# EAGLE board PCB_v20 (EAGLE 9.7.0)
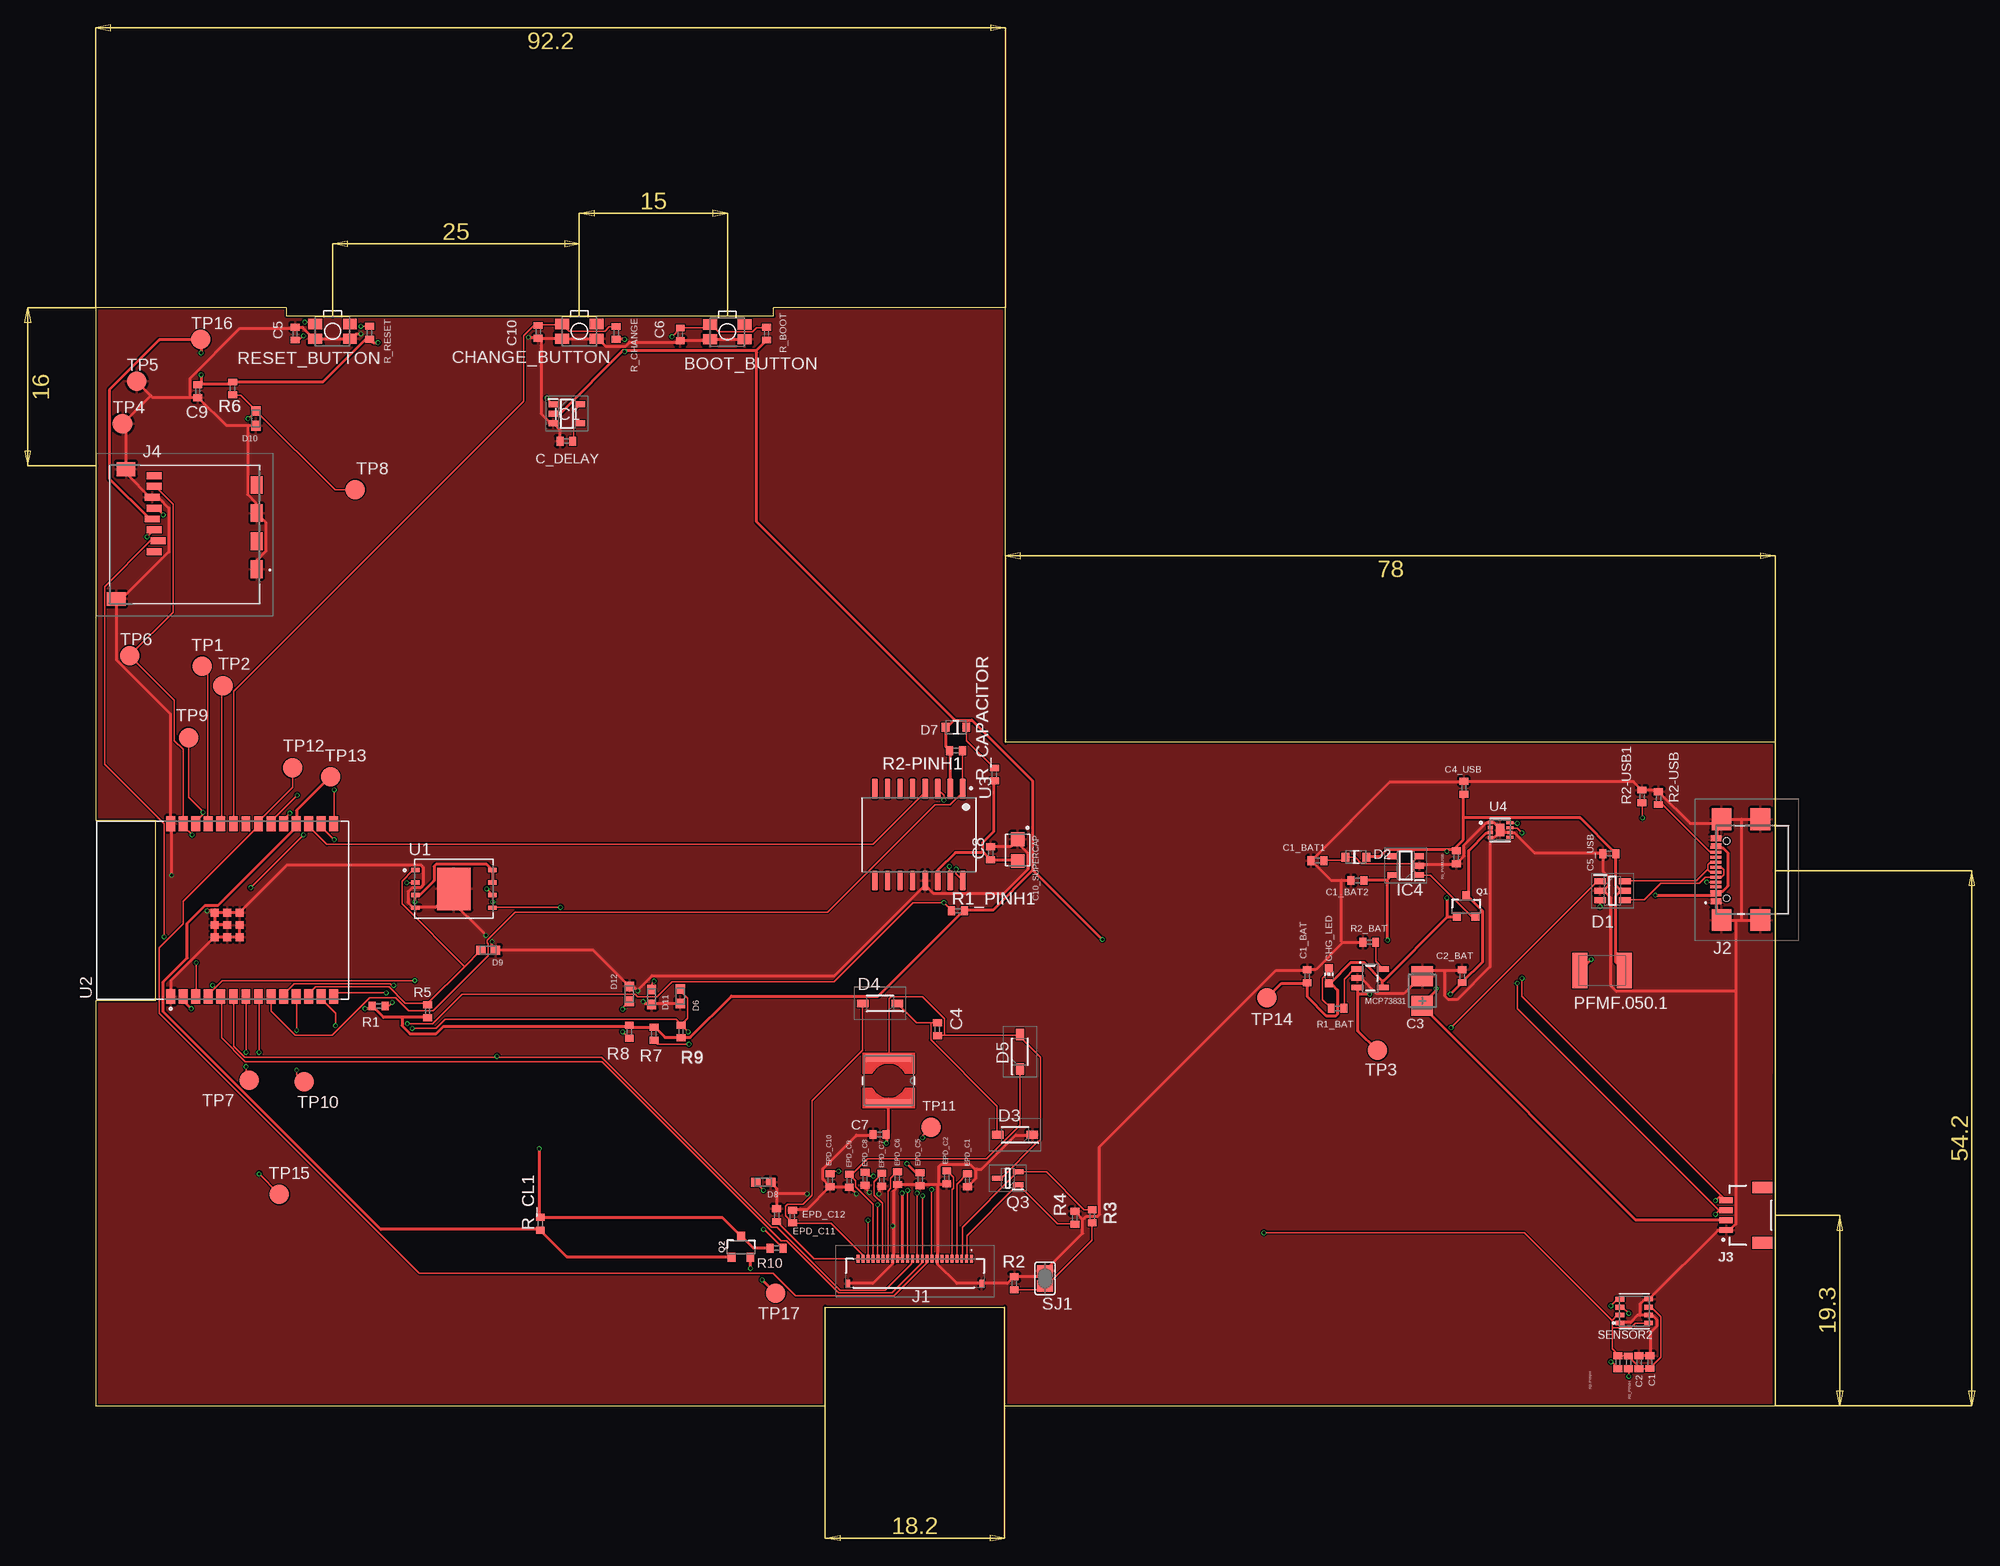
[diagram p0: board, top side]
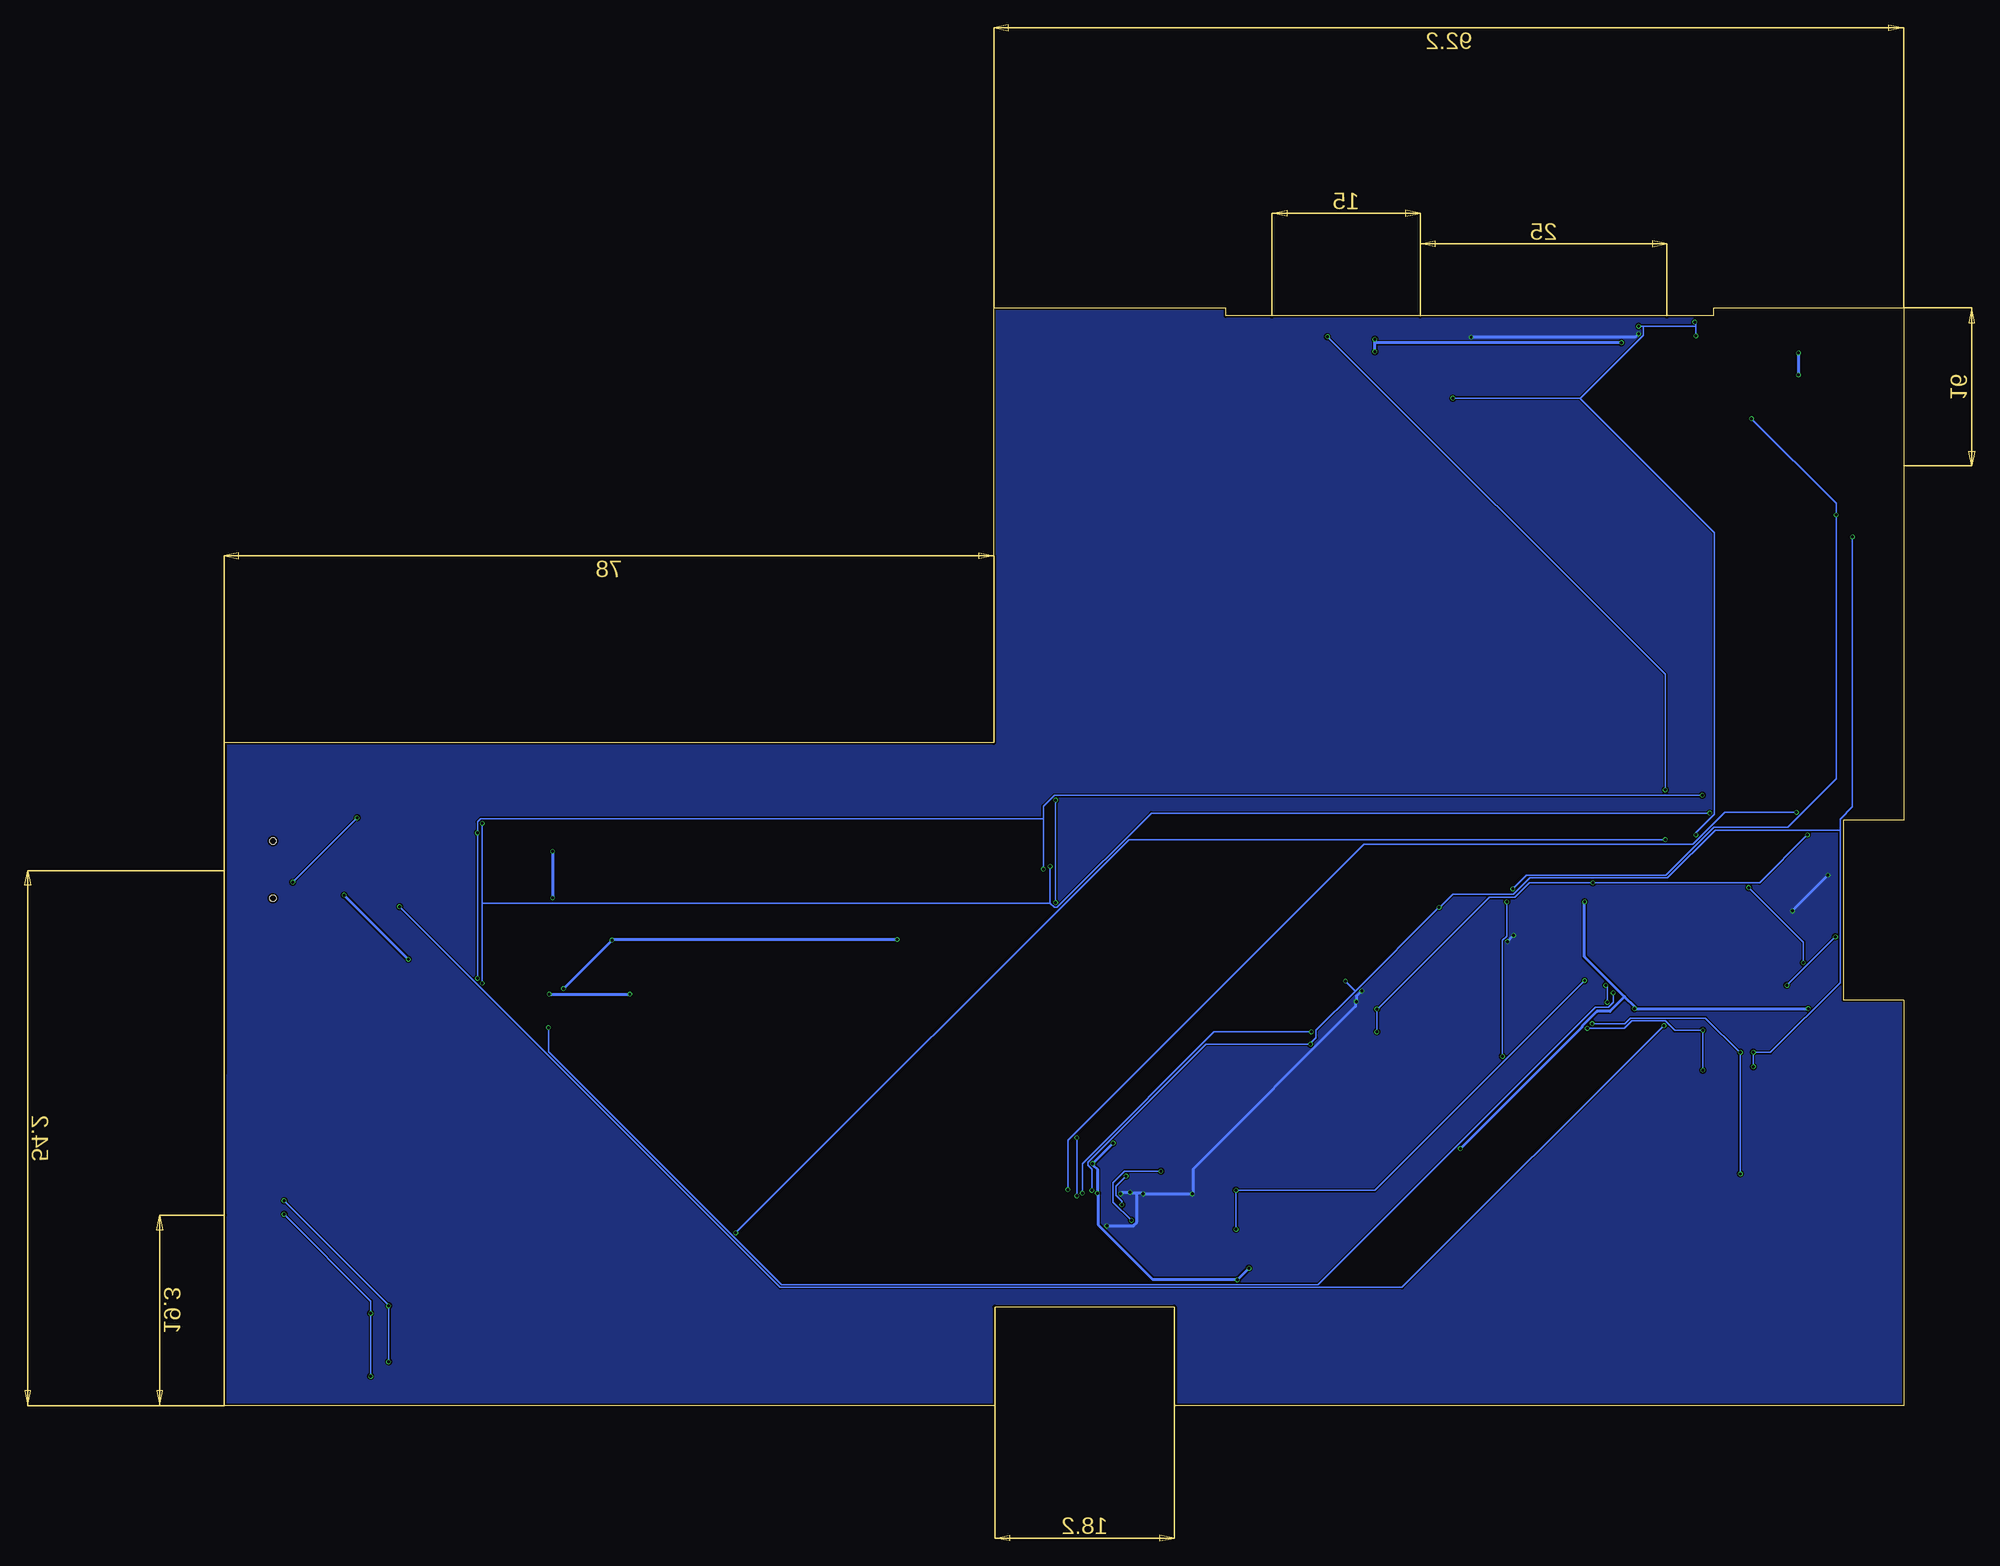
[diagram p1: board, bottom side, seen from below]

Size 187.7 x 120.4 mm. Coordinates in mm from the lower left corner, seen from the top.
Outline: 174.6,19.3 174.6,0 96.5,0 96.5,10 78.3,10 78.3,0 4.4,0 4.4,41.1 10.5,41.1 10.5,59.3 4.4,59.3 4.4,95.2
Outline: 174.6,19.3 174.6,54.2
Outline: 174.6,54.2 174.6,67.2 96.6,67.2 96.6,111.2 73.1,111.2 73.1,110.4 68.4,110.4
Outline: 4.4,95.2 4.4,111.2 23.7,111.2 23.7,110.4 28.4,110.4
Outline: 28.4,110.4 53.4,110.4 68.4,110.4
Outline: 174.6,54.2 187.7,54.2
Outline: 174.6,19.3 179.3,19.3
Outline: 4.4,95.2 0,95.2
Outline: 68.4,110.4 68.4,120.4
Outline: 28.4,110.4 28.4,114.35
Copper layers (1*16): Top 0.035mm / dielectric 1.6mm / Bottom 0.035mm
Design rules "jlcpcb-2layers.dru": minimum track width 0.15mm, minimum drill 0.3mm, track to track 5mil, track to pad 5mil, pad to pad 5mil, via to via 5mil, smd to smd 5mil, copper to edge 0.2mm, drill to drill 6mil, minimum pad ring 10mil, minimum via ring 3mil, stop-mask expansion 4mil, vias tented up to drill 0mil, thermal gap 10mil
Net classes: 1 POWER: width 0.3 mm

## Footprints (pad centres in the part's own frame; a part is rotated, then mirrored left to right if it is on the bottom)
MYBUTTON = smd 1.4 x 1.05: 1 1.75,0.75; 2 -1.75,0.75; 3 -1.75,-0.75; 4 1.75,-0.75
EAGLE-LTSPICE_C0402 = smd 0.7 x 0.9: 1 -0.65,0; 2 0.65,0
RCL_CT3528 = smd 2 x 2.2: + -1.5,0; - 1.5,0
CAPCP3225X100N = smd 1.4 x 1.4: 1 -1.1,0; 2 1.1,0
ADAFRUIT_CHIP-LED0603 = smd 0.8 x 0.8: A 0,-0.75; C 0,0.75
SOT95P280X145-6N = smd 1.2 x 0.6: 1 -1.25,0.95; 2 -1.25,0; 3 -1.25,-0.95; 4 1.25,-0.95; 5 1.25,0; 6 1.25,0.95
ESP32_WROVER_AVX---SD0805S020S1R0_AVX_SD0805S020S1R0_0 = smd 0.8 x 0.9: 1 -1.05,0; 2 1.05,0
SOD3716X135N = smd 1.15 x 0.8: 1 -1.75,0; 2 1.75,0
DIOC1608X36N = smd 0.97 x 0.94: 1 -0.75,0; 2 0.75,0
SOT95P280X125-5N = smd 0.9 x 0.6: 1 -1.4,0.95; 2 -1.4,0; 3 -1.4,-0.95; 4 1.4,-0.95; 5 1.4,0.95
SOT95P280X120-5N = smd 0.9 x 0.6: 1 -1.4,0.95; 2 -1.4,0; 3 -1.4,-0.95; 4 1.4,-0.95; 5 1.4,0.95
FH34SRJ24S05SH99 = smd 0.3 x 0.8: 1 5.75,1.45; 2 5.25,1.45; 3 4.75,1.45; 4 4.25,1.45; 5 3.75,1.45; 6 3.25,1.45; 7 2.75,1.45; 8 2.25,1.45; 9 1.75,1.45; 10 1.25,1.45; 11 0.75,1.45; 12 0.25,1.45; 13 -0.25,1.45; 14 -0.75,1.45; 15 -1.25,1.45; 16 -1.75,1.45; 17 -2.25,1.45; 18 -2.75,1.45; 19 -3.25,1.45; 20 -3.75,1.45; 21 -4.25,1.45; 22 -4.75,1.45; 23 -5.25,1.45; 24 -5.75,1.45 | smd 0.4 x 0.8: MP1 6.75,-1.05; MP2 -6.75,-1.05
SAMACSYS_PARTS_USB4110GFA = smd 0.3 x 1.074: A1 -3.35,3.678; A4 -2.55,3.678; A9 2.55,3.678; A12 3.35,3.678; B1 3.05,3.678; B12 -3.05,3.678 | smd 0.3 x 1.15: A5 -1.25,3.678; A6 -0.25,3.678; A7 0.25,3.678; A8 1.25,3.678; B4 2.25,3.678; B5 1.75,3.678; B6 0.75,3.678; B7 -0.75,3.678; B8 -1.75,3.678; B9 -2.25,3.678 | smd 2.18 x 2: MP1 -5.11,-0.827; MP2 5.11,-0.827; MP3 -5.11,3.103; MP4 5.11,3.103 | hole 0.65: -2.89,2.603; 2.89,2.603
JST04_1MM_RA = smd 0.6 x 1.35: 1 -1.5,0; 2 -0.5,0; 3 0.5,0; 4 1.5,0 | smd 1.2 x 2: NC1 2.8,-3.675; NC2 -2.8,-3.675
112ATAARR03ATTEND = smd 1.8 x 1.2: G1 10.6,10.4; G2 4.9,10.4; S1 7.75,10.4; S2 2.05,10.4 | smd 1.4 x 1.9: G3 13.6,-3.85; G4 0.45,-2.85 | smd 0.7 x 1.5: P1 8.8,0; P2 7.7,0.4; P3 6.6,0; P4 5.5,-0.2; P5 4.4,0; P6 3.3,-0.2; P7 2.2,0; P8 1.1,0
IND_4828-WE-TPC_WRE = smd 0.762 x 4.572: 1 -2.286,0; 2 2.286,0
ESP32_WROVER_SPARKFUN-IC-POWER_SOT23-5 = smd 0.55 x 1.2: 1 -0.95,-1.3; 2 0,-1.3; 3 0.95,-1.3; 4 0.95,1.3; 5 -0.95,1.3
ESP32C6_VARISTOR_CT/CN1812 = smd 1.5 x 3.6: 1 -2.25,0; 2 2.25,0
ESP32_WROVER_SPARKFUN-DISCRETESEMI_SOT23-3 = smd 0.8 x 0.9: 1 -0.95,-1; 2 0.95,-1; 3 0,1.1
SOT65P210X110-3N = smd 1.05 x 0.5: 1 -1.05,0.65; 2 -1.05,-0.65; 3 1.05,0
ESP32_WROVER_EAGLE-LTSPICE_R0402 = smd 0.7 x 0.9: 1 -0.65,0; 2 0.65,0
ESP32_WROVER_BME680_PSON80P300X300X100-8N = smd 1.016 x 0.5: 1 1.458,1.2; 2 1.458,0.4; 3 1.458,-0.4; 4 1.458,-1.2; 5 -1.458,-1.22; 6 -1.458,-0.4; 7 -1.458,0.4; 8 -1.458,1.2
SJ = smd 1.168 x 1.6: 1 -0.762,0; 2 0.762,0
TP20R = smd 2 x 2: TP 0,0
SON127P600X800X80-9N = smd 0.94 x 0.44: 1 -3.895,1.905; 2 -3.895,0.635; 3 -3.895,-0.635; 4 -3.895,-1.905; 5 3.895,-1.905; 6 3.895,-0.635; 7 3.895,0.635; 8 3.895,1.905 | smd 3.4 x 4.3: 9 0,0
XCVR_ESP32-C6-WROOM-1-N8 = smd 1.5 x 0.9: 1 -8.75,5.26; 2 -8.75,3.99; 3 -8.75,2.72; 4 -8.75,1.45; 5 -8.75,0.18; 6 -8.75,-1.09; 7 -8.75,-2.36; 8 -8.75,-3.63; 9 -8.75,-4.9; 10 -8.75,-6.17; 11 -8.75,-7.44; 12 -8.75,-8.71; 13 -8.75,-9.98; 14 -8.75,-11.25; 15 8.75,-11.25; 16 8.75,-9.98; 17 8.75,-8.71; 18 8.75,-7.44; 19 8.75,-6.17; 20 8.75,-4.9; 21 8.75,-3.63; 22 8.75,-2.36; 23 8.75,-1.09; 24 8.75,0.18; 25 8.75,1.45; 26 8.75,2.72; 27 8.75,3.99; 28 8.75,5.26 | smd 0.8 x 0.8: 29_1 -2.755,0.79; 29_2 -1.505,0.79; 29_3 -0.255,0.79; 29_4 -2.755,-0.46; 29_5 -1.505,-0.46; 29_6 -0.255,-0.46; 29_7 -2.755,-1.71; 29_8 -1.505,-1.71; 29_9 -0.255,-1.71
SOIC127P1032X265-16N = smd 2.05 x 0.59: 1 -4.655,4.445; 2 -4.655,3.175; 3 -4.655,1.905; 4 -4.655,0.635; 5 -4.655,-0.635; 6 -4.655,-1.905; 7 -4.655,-3.175; 8 -4.655,-4.445; 9 4.655,-4.445; 10 4.655,-3.175; 11 4.655,-1.905; 12 4.655,-0.635; 13 4.655,0.635; 14 4.655,1.905; 15 4.655,3.175; 16 4.655,4.445
SON50P200X200X80-9N = smd 0.608 x 0.346: 1 -0.985,0.75; 2 -0.985,0.25; 3 -0.985,-0.25; 4 -0.985,-0.75; 6 0.985,-0.25 | smd 0.76 x 0.27: 5 0.985,-0.75; 7 0.985,0.25; 8 0.985,0.75 | smd 0.9 x 1.3: 9 0,0

## Placement (x,y rotation side)
BOOT_BUTTON  BUTTON_CUSYOMV1  [MYBUTTON]  68.4,108.78 180 top
C1  100nF  [EAGLE-LTSPICE_C0402]  161.87,4.42 90 top
C1_BAT  47uF  [EAGLE-LTSPICE_C0402]  127.15,43.51 90 top
C1_BAT1  47uF  [EAGLE-LTSPICE_C0402]  128.19,55.21 180 top
C1_BAT2  47uF  [EAGLE-LTSPICE_C0402]  132.25,53.21 180 top
C2  100nF  [EAGLE-LTSPICE_C0402]  160.77,4.4 90 top
C2_BAT  47uF  [EAGLE-LTSPICE_C0402]  142.85,43.52 90 top
C3  100uF TANT  [RCL_CT3528]  138.8,42.01 90 top
C4  47uF/25V  [EAGLE-LTSPICE_C0402]  89.69,38.13 270 top
C4_USB  100nF  [EAGLE-LTSPICE_C0402]  143.03,62.61 90 top
C5  1uF  [EAGLE-LTSPICE_C0402]  24.61,108.61 90 top
C5_USB  4.7uF  [EAGLE-LTSPICE_C0402]  157.78,55.93 180 top
C6  100nF  [EAGLE-LTSPICE_C0402]  63.63,108.52 270 top
C7  10uF  [EAGLE-LTSPICE_C0402]  83.83,27.47 180 top
C8  100nF  [EAGLE-LTSPICE_C0402]  95.07,55.96 90 top
C9  100nF  [EAGLE-LTSPICE_C0402]  14.73,102.76 270 top
C10  100nF  [EAGLE-LTSPICE_C0402]  49.23,108.78 270 top
C10_SUPERCAP  CPH3225A  [CAPCP3225X100N]  97.82,56.28 270 top
C_DELAY  100nF  [EAGLE-LTSPICE_C0402]  52.09,97.71 180 top
CHANGE_BUTTON  BUTTON_CUSYOMV1  [MYBUTTON]  53.4,108.84 180 top
CHG_LED  [ADAFRUIT_CHIP-LED0603]  129.34,43.55 0 top
D1  USBLC6-2SC6Y  [SOT95P280X145-6N]  158.08,52.17 0 top
D2  SD0805S020S1R0  [ESP32_WROVER_AVX---SD0805S020S1R0_AVX_SD0805S020S1R0_0]  132.09,55.58 0 top
D3  MBR0530  [SOD3716X135N]  97.55,27.43 180 top
D4  MBR0530  [SOD3716X135N]  83.88,40.75 180 top
D5  MBR0530  [SOD3716X135N]  98.05,35.86 90 top
D6  PGB1010603MR  [DIOC1608X36N]  63.63,41.48 90 top
D7  SD0805S020S1R0  [ESP32_WROVER_AVX---SD0805S020S1R0_AVX_SD0805S020S1R0_0]  91.56,68.72 180 top
D8  PGB1010603MR  [DIOC1608X36N]  72.04,22.63 180 top
D9  PGB1010603MR  [DIOC1608X36N]  44.16,46.13 180 top
D10  PGB1010603MR  [DIOC1608X36N]  20.63,100.02 90 top
D11  PGB1010603MR  [DIOC1608X36N]  60.73,41.4 90 top
D12  PGB1010603MR  [DIOC1608X36N]  58.47,41.72 270 top
EPD_C1  1uF/50V  [EAGLE-LTSPICE_C0402]  92.73,22.83 90 top
EPD_C2  1uF/50V  [EAGLE-LTSPICE_C0402]  90.63,23.14 90 top
EPD_C5  1uF/50V  [EAGLE-LTSPICE_C0402]  87.93,22.95 90 top
EPD_C6  1uF/50V  [EAGLE-LTSPICE_C0402]  85.63,23.06 90 top
EPD_C7  1uF/50V  [EAGLE-LTSPICE_C0402]  84.05,22.88 90 top
EPD_C8  1uF/50V  [EAGLE-LTSPICE_C0402]  82.35,22.99 90 top
EPD_C9  1uF/50V  [EAGLE-LTSPICE_C0402]  80.75,22.8 90 top
EPD_C10  1uF/50V  [EAGLE-LTSPICE_C0402]  78.81,22.85 90 top
EPD_C11  1uF/50V  [EAGLE-LTSPICE_C0402]  74.99,19.17 270 top
EPD_C12  1uF/50V  [EAGLE-LTSPICE_C0402]  73.39,19.31 270 top
IC1  BD5229G-TR  [SOT95P280X125-5N]  52.13,100.49 0 top
IC4  XC6220A331MR-G  [SOT95P280X120-5N]  137.13,54.71 180 top
J1  FH34SRJ-24S-0.5SH_99_  [FH34SRJ24S05SH99]  87.4,13.42 0 top
J2  SAMACSYS_PARTS_USB4110-GF-A  [SAMACSYS_PARTS_USB4110GFA]  172.24,54.3 90 top
J3  QWIIC_RIGHT_ANGLE  [JST04_1MM_RA]  169.6,19.3 90 top
J4  112A-TAAR-R03_ATTEND  [112ATAARR03ATTEND]  10.32,95.33 270 top
L1  68uH  [IND_4828-WE-TPC_WRE]  84.75,32.93 270 top
MCP73831  ESP32_WROVER_SPARKFUN-IC-POWER_MCP73831  [ESP32_WROVER_SPARKFUN-IC-POWER_SOT23-5]  133.54,43.31 270 top
PFMF.050.1  ESP32C6_VARISTORCN1812  [ESP32C6_VARISTOR_CT/CN1812]  157.04,44.1 0 top
Q1  20V/4.2A/52mΩ/1.4W  [ESP32_WROVER_SPARKFUN-DISCRETESEMI_SOT23-3]  143.26,50.56 0 top
Q2  20V/4.2A/52mΩ/1.4W  [ESP32_WROVER_SPARKFUN-DISCRETESEMI_SOT23-3]  69.78,16.06 0 top
Q3  SI1308EDL-T1-GE3  [SOT65P210X110-3N]  96.81,23.05 180 top
R1  10k  [ESP32_WROVER_EAGLE-LTSPICE_R0402]  33.07,40.49 180 top
R1_BAT  200  [ESP32_WROVER_EAGLE-LTSPICE_R0402]  130.23,40.25 0 top
R1_PINH  10K  [ESP32_WROVER_EAGLE-LTSPICE_R0402]  159.71,4.39 90 top
R1_PINH1  10k  [ESP32_WROVER_EAGLE-LTSPICE_R0402]  91.76,50.14 0 top
R1_PWRUSB  100k  [ESP32_WROVER_EAGLE-LTSPICE_R0402]  142.26,55.55 90 top
R2  [ESP32_WROVER_EAGLE-LTSPICE_R0402]  97.47,12.4 270 top
R2-PINH  10K  [ESP32_WROVER_EAGLE-LTSPICE_R0402]  158.63,4.4 90 top
R2-PINH1  10k  [ESP32_WROVER_EAGLE-LTSPICE_R0402]  91.56,66.36 180 top
R2-USB  5k1  [ESP32_WROVER_EAGLE-LTSPICE_R0402]  162.75,61.55 90 top
R2-USB1  5k1  [ESP32_WROVER_EAGLE-LTSPICE_R0402]  161.07,61.72 270 top
R2_BAT  2K  [ESP32_WROVER_EAGLE-LTSPICE_R0402]  133.44,46.95 0 top
R3  0.47  [ESP32_WROVER_EAGLE-LTSPICE_R0402]  105.37,19.19 90 top
R4  10k  [ESP32_WROVER_EAGLE-LTSPICE_R0402]  103.61,19.05 270 top
R5  10K  [ESP32_WROVER_EAGLE-LTSPICE_R0402]  38.03,39.97 270 top
R6  10K  [ESP32_WROVER_EAGLE-LTSPICE_R0402]  18.27,103.05 90 top
R7  10K  [ESP32_WROVER_EAGLE-LTSPICE_R0402]  60.97,37.67 90 top
R8  10K  [ESP32_WROVER_EAGLE-LTSPICE_R0402]  58.47,37.89 90 top
R9  10K  [ESP32_WROVER_EAGLE-LTSPICE_R0402]  63.71,37.91 270 top
R10  10K  [ESP32_WROVER_EAGLE-LTSPICE_R0402]  73.39,15.97 180 top
R_BOOT  10k  [ESP32_WROVER_EAGLE-LTSPICE_R0402]  72.37,108.61 270 top
R_CAPACITOR  15  [ESP32_WROVER_EAGLE-LTSPICE_R0402]  95.46,63.95 90 top
R_CHANGE  10K  [ESP32_WROVER_EAGLE-LTSPICE_R0402]  57.14,108.68 270 top
R_CL1  10K  [ESP32_WROVER_EAGLE-LTSPICE_R0402]  49.45,18.43 90 top
R_RESET  10k  [ESP32_WROVER_EAGLE-LTSPICE_R0402]  32.14,108.7 270 top
RESET_BUTTON  BUTTON_CUSYOMV1  [MYBUTTON]  28.4,108.84 180 top
SENSOR2  BME688  [ESP32_WROVER_BME680_PSON80P300X300X100-8N]  160.29,9.58 180 top
SJ1  [SJ]  100.59,12.9 270 top
TP1  TPTP20R  [TP20R]  15.17,74.91 0 top
TP2  TPTP20R  [TP20R]  17.29,72.91 0 top
TP3  TPTP20R  [TP20R]  134.29,35.99 0 top
TP4  TPTP20R  [TP20R]  7.11,99.49 0 top
TP5  TPTP20R  [TP20R]  8.53,103.79 0 top
TP6  TPTP20R  [TP20R]  7.85,75.99 0 top
TP7  TPTP20R  [TP20R]  19.97,32.99 0 top
TP8  TPTP20R  [TP20R]  30.69,92.79 0 top
TP9  TPTP20R  [TP20R]  13.81,67.69 0 top
TP10  TPTP20R  [TP20R]  25.5,32.81 0 top
TP11  TPTP20R  [TP20R]  89.05,28.21 0 top
TP12  TPTP20R  [TP20R]  24.35,64.61 0 top
TP13  TPTP20R  [TP20R]  28.2,63.71 0 top
TP14  TPTP20R  [TP20R]  123.05,41.31 0 top
TP15  TPTP20R  [TP20R]  23,21.41 0 top
TP16  TPTP20R  [TP20R]  15.05,108.01 0 top
TP17  TPTP20R  [TP20R]  73.3,11.41 0 top
U1  W25Q512JVEIQ  [SON127P600X800X80-9N]  40.69,52.36 0 top
U2  ESP32-C6-WROOM-1-N8  [XCVR_ESP32-C6-WROOM-1-N8]  17.26,50.2 90 top
U3  DS3231SN#  [SOIC127P1032X265-16N]  87.8,57.85 270 top
U4  MAX17048G+T10  [SON50P200X200X80-9N]  146.7,58.32 0 top

## Library data of the parts
BOOT_BUTTON CHANGE_BUTTON CHG_LED J2 PFMF.050.1 RESET_BUTTON SJ1 TP1-TP17 = DeskAssistant v19 v1
C1 C1_BAT C1_BAT1 C1_BAT2 C2 C2_BAT C4 C4_USB C5 C5_USB C6-C10 C_DELAY EPD_C1 EPD_C2 EPD_C5-EPD_C12 = DeskAssistant v19 v1; SPICEMODEL: NONE; SPICEPREFIX: C
C3 = DeskAssistant v19 v1; SPICEPREFIX: C
C10_SUPERCAP = DeskAssistant v19 v1; AVAILABILITY: Not in stock; CHECK_PRICES: https://www.snapeda.com/parts/CPH3225A/Seiko+Instruments/view-part/?ref=eda; DESCRIPTION: 11 mF (EDLC) Supercapacitor 3.3 V 1210 (3225 Metric) - -; MF: Seiko Instruments; MP: CPH3225A; PACKAGE: 1210 Seiko; PRICE: None; PURCHASE-URL: https://www.snapeda.com/api/url_track_click_mouser/?unipart_id=562593&manufacturer=Seiko Instruments&part_name=CPH3225A&search_term=None; SNAPEDA_LINK: https://www.snapeda.com/parts/CPH3225A/Seiko+Instruments/view-part/?ref=snap
D1 = DeskAssistant v19 v1; AVAILABILITY: In Stock; CHECK_PRICES: https://www.snapeda.com/parts/USBLC6-2SC6Y/STMicroelectronics/view-part/?ref=eda; DESCRIPTION: 17V Clamp 5A (8/20µs) Ipp Tvs Diode Surface Mount SOT-23-6; MF: STMicroelectronics; MP: USBLC6-2SC6Y; PACKAGE: SOT-23-6 STMicroelectronics; PRICE: None; SNAPEDA_LINK: https://www.snapeda.com/parts/USBLC6-2SC6Y/STMicroelectronics/view-part/?ref=snap
D2 D7 = DeskAssistant v19 v1; CENTROID_NOT_SPECIFIED: No; DATASHEET: http://datasheets.avx.com/schottky.pdf; DIGIKEY_DESCRIPTION: DIODE SCHOTTKY 20V 1A 0805; DIGIKEY_PART_NUMBER: 478-7800-1-ND; LEAD_FREE: yes; MF: AVX; MOUSER_PART_NUMBER: 581-SD0805S020S1R0; PACKAGE: 0805 (2012 metric); PREFIX: D; ROHS: yes; TEMPERATURE_RANGE_HIGH: +125°C; TEMPERATURE_RANGE_LOW: -55°C
D3-D5 = DeskAssistant v19 v1; AVAILABILITY: In Stock; CHECK_PRICES: https://www.snapeda.com/parts/MBR0530/Onsemi/view-part/?ref=eda; DESCRIPTION: Diode Schottky 30 V 500mA Surface Mount SOD-123; MF: ON Semiconductor; MP: MBR0530; PACKAGE: SOD-123-2 ON Semiconductor; PRICE: None; PURCHASE-URL: https://www.snapeda.com/api/url_track_click_mouser/?unipart_id=179458&manufacturer=ON Semiconductor&part_name=MBR0530&search_term=None; SNAPEDA_LINK: https://www.snapeda.com/parts/MBR0530/Onsemi/view-part/?ref=snap
D6 D8-D12 = DeskAssistant v19 v1; AVAILABILITY: In Stock; CHECK_PRICES: https://www.snapeda.com/parts/PGB1010603MR/Littelfuse/view-part/?ref=eda; DESCRIPTION: 150V (Typ) Clamp - Ipp Tvs Diode Surface Mount 0603 (1608 Metric); MF: Littelfuse Inc.; MP: PGB1010603MR; PACKAGE: 0603 Littelfuse Inc.; PRICE: None; PURCHASE-URL: https://www.snapeda.com/api/url_track_click_mouser/?unipart_id=5659453&manufacturer=Littelfuse Inc.&part_name=PGB1010603MR&search_term=None; SNAPEDA_LINK: https://www.snapeda.com/parts/PGB1010603MR/Littelfuse/view-part/?ref=snap
IC1 = DeskAssistant v19 v1; DESCRIPTION: Voltage Detector with Adjustable Delay Time: CMOS processes are utilized to develop high precision, low current consumption CMOS reset ICs that allow arbitrary setting of the delay time. The extensive lineup includes both Nch Open Drain and CMOS output types in a wide range of detection voltages (from 2.3V to 6.0V, in 0.1V steps), enabling selection of the ideal solution based on customer requirements. In addition, the entire series is of course both lead-free and RoHS-compliant.; HEIGHT: 1.25mm; MANUFACTURER_NAME: ROHM Semiconductor; MANUFACTURER_PART_NUMBER: BD5229G-TR; MOUSER_PART_NUMBER: 755-BD5229G-TR; MOUSER_PRICE-STOCK: https://www.mouser.co.uk/ProductDetail/ROHM-Semiconductor/BD5229G-TR?qs=4kLU8WoGk0vvnhrrYwdszw%3D%3D
IC4 = DeskAssistant v19 v1; DESCRIPTION: LDO Voltage Regulators; HEIGHT: 1.2mm; MANUFACTURER_NAME: Torex; MANUFACTURER_PART_NUMBER: XC6220A331MR-G; MOUSER_PART_NUMBER: 865-XC6220A331MR-G; MOUSER_PRICE-STOCK: https://www.mouser.co.uk/ProductDetail/Torex-Semiconductor/XC6220A331MR-G?qs=AsjdqWjXhJ8ZSWznL1J0gg%3D%3D
J1 = DeskAssistant v19 v1; DESCRIPTION: 24 Position FFC, FPC Connector Contacts, Top and Bottom 0.020" (0.50mm) Surface Mount, Right Angle; HEIGHT: 1.1mm; MANUFACTURER_NAME: Hirose; MANUFACTURER_PART_NUMBER: FH34SRJ-24S-0.5SH(99); MOUSER_PART_NUMBER: 798-FH34SRJ24S05SH99; MOUSER_PRICE-STOCK: https://www.mouser.co.uk/ProductDetail/Hirose-Connector/FH34SRJ-24S-0.5SH99?qs=vcbW%252B4%252BSTIpKBl5ap9J8Fw%3D%3D
J3 = DeskAssistant v19 v1; PROD_ID: CONN-13694
J4 = DeskAssistant v19 v1; DESCRIPTION: Micro SD Card Socket, Push-Push Type, Top Mount, SMT, H=1.83mm, 10u; HEIGHT: 1.9mm; MANUFACTURER_NAME: ATTEND; MANUFACTURER_PART_NUMBER: 112A-TAAR-R03 ATTEND
L1 = DeskAssistant v19 v1; COPYRIGHT: Copyright (C) 2024 Ultra Librarian. All rights reserved.; MANUFACTURER_PART_NUMBER: 744043680; MFR_NAME: Wurth Electronics
MCP73831 = DeskAssistant v19 v1; PROD_ID: IC-09995
Q1 Q2 = DeskAssistant v19 v1; PROD_ID: TRAN-14388
Q3 = DeskAssistant v19 v1; AVAILABILITY: In Stock; CHECK_PRICES: https://www.snapeda.com/parts/SI1308EDL-T1-GE3/Vishay+Siliconix/view-part/?ref=eda; DESCRIPTION: Si1308EDL-T1-GE3 N-channel MOSFET Transistor, 1.5 A, 30 V, 3-Pin SC-70 | Siliconix / Vishay SI1308EDL-T1-GE3; MF: Vishay Siliconix; MP: SI1308EDL-T1-GE3; PACKAGE: SOT-323 Vishay Semiconductor; PRICE: None; PURCHASE-URL: https://www.snapeda.com/api/url_track_click_mouser/?unipart_id=274603&manufacturer=Vishay Siliconix&part_name=SI1308EDL-T1-GE3&search_term=None; SNAPEDA_LINK: https://www.snapeda.com/parts/SI1308EDL-T1-GE3/Vishay+Siliconix/view-part/?ref=snap
R1 R1_BAT R1_PINH R1_PINH1 R1_PWRUSB R2 R2-PINH R2-PINH1 R2-USB R2-USB1 R2_BAT R3-R10 R_BOOT R_CAPACITOR R_CHANGE R_CL1 R_RESET = DeskAssistant v19 v1; SPICEMODEL: NONE; SPICEPREFIX: R
SENSOR2 = DeskAssistant v19 v1; AVAILABILITY: Unavailable; DESCRIPTION: Integrated Environmental Unit; MF: Bosch Sensortec; MP: BME680; PACKAGE: LGA-8 Bosch Tools; PRICE: None
U1 = DeskAssistant v19 v1; AVAILABILITY: In Stock; CHECK_PRICES: https://www.snapeda.com/parts/W25Q512JVEIQ/Winbond+Electronics/view-part/?ref=eda; DESCRIPTION: FLASH - NOR Memory IC 512Mb (64M x 8) SPI - Quad I/O 133 MHz 8-WSON (8x6); MF: Winbond Electronics; MP: W25Q512JVEIQ; PACKAGE: Package; PRICE: None; SNAPEDA_LINK: https://www.snapeda.com/parts/W25Q512JVEIQ/Winbond+Electronics/view-part/?ref=snap
U2 = DeskAssistant v19 v1; AVAILABILITY: In Stock; CHECK_PRICES: https://www.snapeda.com/parts/ESP32-C6-WROOM-1-N8/Espressif+Systems/view-part/?ref=eda; DESCRIPTION: Multiprotocol Modules ESP32-C6 module, Wi-Fi 6 in 2.4 GHz band, Bluetooth 5, Zigbee 3.0 and Thread. ESP34-WROOM Compatible - ENGINEERING SAMPLE; MF: Espressif Systems; MP: ESP32-C6-WROOM-1-N8; PACKAGE: None; PRICE: None; SNAPEDA_LINK: https://www.snapeda.com/parts/ESP32-C6-WROOM-1-N8/Espressif+Systems/view-part/?ref=snap
U3 = DeskAssistant v19 v1; AVAILABILITY: In Stock; CHECK_PRICES: https://www.snapeda.com/parts/DS3231SN%23/Analog+Devices/view-part/?ref=eda; DESCRIPTION: Extremely Accurate I²C-Integrated RTC/TCXO/Crystal; MF: Analog Devices; MP: DS3231SN#; PACKAGE: SOIC-16 Maxim; PRICE: None; PURCHASE-URL: https://www.snapeda.com/api/url_track_click_mouser/?unipart_id=99048&manufacturer=Analog Devices&part_name=DS3231SN#&search_term=None; SNAPEDA_LINK: https://www.snapeda.com/parts/DS3231SN%23/Analog+Devices/view-part/?ref=snap
U4 = DeskAssistant v19 v1; AVAILABILITY: In Stock; CHECK_PRICES: https://www.snapeda.com/parts/MAX17048G+T10/Analog+Devices/view-part/?ref=eda; DESCRIPTION: 3µA 1-Cell/2-Cell Fuel Gauge with ModelGauge; MF: Analog Devices; MP: MAX17048G+T10; PACKAGE: TDFN-8 Maxim; PRICE: None; PURCHASE-URL: https://www.snapeda.com/api/url_track_click_mouser/?unipart_id=329239&manufacturer=Analog Devices&part_name=MAX17048G+T10&search_term=None; SNAPEDA_LINK: https://www.snapeda.com/parts/MAX17048G+T10/Analog+Devices/view-part/?ref=snap

## Nets
3V3 [POWER]: C1_BAT2.1 C3.+ C9.1 D7.2 IC1.2 IC4.5 J3.2 J4.P4 Q2.3 R1.2 R1_PINH1.2 R2-PINH1.2 R5.2 R6.2 R7.2 R8.2 R9.2 R10.2 R_BOOT.2 R_CHANGE.2 R_CL1.2 R_RESET.2 TP16.TP U1.3 U1.7 U1.8 U2.2 U3.2
12C_PW: C1.1 C2.1 R1_PINH.2 R2-PINH.2 SENSOR2.2 SENSOR2.6 SENSOR2.8 U2.16
32KHZ: R2-PINH1.1 U2.9 U3.1
DN: D1.4 J2.A7 J2.B7
DP: D1.6 J2.A6 J2.B6
EPD_3V3 [POWER]: C7.1 EPD_C5.2 J1.15 J1.16 L1.2 Q2.2 TP17.TP
EPD_3V3_C [POWER]: Q2.1 R_CL1.1 TP13.TP U2.18
EPD_BUSY: J1.9 TP9.TP U2.26
EPD_CS: D6.2 J1.12 R9.1 TP10.TP U2.11
EPD_DC: J1.11 TP11.TP U2.5
EPD_RST: J1.10 TP12.TP U2.21
FLASH_CS: D9.2 R5.1 U1.1 U2.12
GDR: J1.2 Q3.1 R4.2
GND [POWER]: BOOT_BUTTON.1 BOOT_BUTTON.2 C1.2 C1_BAT1.2 C1_BAT2.2 C1_BAT.2 C2.2 C2_BAT.2 C3.- C4_USB.2 C5.2 C5_USB.2 C6.2 C7.2 C8.2 C9.2 C10.2 C10_SUPERCAP.1 C_DELAY.2 CHANGE_BUTTON.1 CHANGE_BUTTON.2 D1.2 D3.1 D6.1 D8.1 D9.1 D10.1 D11.1 D12.1 EPD_C1.1 EPD_C2.1 EPD_C5.1 EPD_C6.1 EPD_C7.1 EPD_C8.1 EPD_C9.1 EPD_C10.1 EPD_C11.1 EPD_C12.1 IC1.3 IC4.2 J1.8 J1.17 J1.MP1 J1.MP2 J2.A1 J2.A12 J2.B1 J2.B12 J2.MP1 J2.MP2 J2.MP3 J2.MP4 J3.1 J4.G1 J4.G2 J4.G3 J4.G4 J4.P6 MCP73831.2 R1_PWRUSB.1 R2-USB1.1 R2-USB.2 R2.1 R2_BAT.1 R4.1 RESET_BUTTON.1 RESET_BUTTON.2 SENSOR2.1 SENSOR2.5 SENSOR2.7 SJ1.1 TP4.TP TP5.TP U1.4 U1.9 U2.1 U2.28 U2.29_1 U2.29_2 U2.29_3 U2.29_4 U2.29_5 U2.29_6 U2.29_7 U2.29_8 U2.29_9 U3.13 U4.1 U4.4 U4.6 U4.9
INT_RTC: R1_PINH1.1 TP15.TP U2.8 U3.3
IO/BOOT: BOOT_BUTTON.4 C6.1 R_BOOT.1 U2.15
IO/CHANGE: C10.1 CHANGE_BUTTON.4 R_CHANGE.1 U2.23
MISO: D12.2 J4.P7 R8.1 TP6.TP U1.2 U2.27
MOSI: D11.2 J1.14 J4.P3 R7.1 TP7.TP U1.5 U2.7
N$1: J2.A5 R2-USB1.2
N$2: J2.B5 R2-USB.1
N$3: C1_BAT1.1 D2.1 IC4.1 IC4.3 Q1.2
N$4: C4.1 D3.2 D4.1
N$7: C_DELAY.1 IC1.5
N$8: CHG_LED.C R1_BAT.1
N$9: MCP73831.1 R1_BAT.2
N$10: MCP73831.5 R2_BAT.2
N$11: EPD_C12.2 J1.24
N$13: EPD_C10.2 J1.22
N$15: EPD_C7.2 J1.19
N$16: EPD_C8.2 J1.20
N$17: D7.1 R_CAPACITOR.2
N$18: EPD_C6.2 J1.18
N$19: R1.1 U2.10
N$20: EPD_C2.2 J1.5
N$22: EPD_C1.2 J1.4
PREVGH: D5.1 EPD_C9.2 J1.21
PREVGL: D4.2 EPD_C11.2 J1.23
RESE: J1.3 Q3.2 R3.2
RESE': R2.2 R3.1 SJ1.2
RESET: C5.1 IC1.1 R_RESET.1 RESET_BUTTON.4 U2.3
RTC_RST: U2.17 U3.4
RX: TP2.TP U2.24
SCK: D10.2 J1.13 J4.P5 R6.1 TP8.TP U1.6 U2.6
SCL: J3.4 R2-PINH.1 SENSOR2.4 U2.20 U3.16 U4.7
SDA: J3.3 R1_PINH.1 SENSOR2.3 U2.19 U3.15 U4.8
SRC: C4.2 D5.2 L1.1 Q3.3
SS_SD: D8.2 J4.P2 R10.1 U2.4
TX: TP1.TP U2.25
USB_D+: D1.1 U2.14
USB_D-: D1.3 U2.13
VBAT [POWER]: C2_BAT.1 MCP73831.3 Q1.3 TP3.TP U4.2 U4.3
VBUS [POWER]: C1_BAT.1 C4_USB.1 C5_USB.1 CHG_LED.A D1.5 D2.2 MCP73831.4 PFMF.050.1.2 Q1.1 R1_PWRUSB.2 TP14.TP
VRTC [POWER]: C8.1 C10_SUPERCAP.2 R_CAPACITOR.1 U3.14
VUSB [POWER]: J2.A4 J2.A9 J2.B4 J2.B9 PFMF.050.1.1

## Tracks (layer width: path | path; a pad name or v marks a point on that pad's centre or on a via)
3V3  (via drill 0.3)
  Top 0.3: 71.3,106.85 58,106.85 | 58,106.85 57.79,106.85 51.49,100.55 50.8,100.55 IC1.2 | 71.3,106.85 72.33,107.89 R_BOOT.2 | v58,108.03 R_CHANGE.2 | v58,106.78 58,106.85 | J4.P4 10.08,89.89 9.8,89.89 5.79,93.9 5.79,102.91 10.84,107.96 15,107.96 TP16.TP 15.06,107.82 v15.06,106.64 | v15.06,104.43 15.06,103.6 C9.1 14.79,103.46 18.04,103.46 18.25,103.67 R6.2 18.39,103.74 27.46,103.74 31.75,108.03 32.1,108.03 R_RESET.2 32.24,107.96 32.52,107.68 v33,107.68 | 135.21,53.25 132.93,53.25 C1_BAT2.1 | 135.21,53.25 135.7,53.74 IC4.5 | J3.2 169.56,18.84 160.42,18.84 138.81,40.44 C3.+ 138.81,40.65 140.2,42.03 v140.2,42.24 | v135.28,47.16 135.28,53.12 135.21,53.25 | 99.34,54.22 95.33,50.21 92.42,50.21 R1_PINH1.2 92.28,50.07 83.69,41.48 68.8,41.48 64.65,37.33 63.82,37.33 R9.2 63.68,37.33 62.09,37.33 61.12,38.3 R7.2 60.91,38.36 58.62,38.36 58.48,38.5 R8.2 58.35,38.43 39.65,38.43 38.89,37.67 36.26,37.67 35.42,38.5 35.42,39.33 | 99.34,54.22 99.34,63.29 93.18,69.46 91.38,69.46 | 91.38,69.46 90.69,68.77 D7.2 90.55,68.7 90.55,66.76 90.89,66.41 R2-PINH1.2 90.96,66.27 90.96,62.53 U3.2 | R10.2 72.68,16 71.02,16 69.91,17.11 Q2.3 69.77,17.17 67.9,19.04 49.48,19.04 R_CL1.2 49.34,19.18 v49.34,26.04 | U1.7 44.63,53.05 44.63,54.15 U1.8 44.56,54.29 44.01,54.85 38.89,54.85 38.68,54.64 38.68,53.18 37.23,51.73 36.81,51.73 U1.3 36.74,51.59 v36.74,51.04 | 35.42,39.33 37.99,39.33 R5.2 | 35.42,39.33 33.55,39.33 32.45,40.44 R1.2 32.31,40.37 32.17,40.23 v31.69,40.23 | v14.1,40.23 13.33,41 13.33,41.41 U2.2 | v106.41,47.23 99.48,54.15 99.34,54.22 | 71.3,106.85 71.37,106.71 71.37,89.54 91.31,69.6 91.38,69.46
  Bottom 0.3: v58,106.78 58,107.68 | 58,107.68 v58,108.03 | v15.06,106.64 v15.06,104.43 | v33,107.68 58,107.68 | v140.2,42.24 v135.28,47.16 135.14,47.23 v106.41,47.23 | v14.1,40.23 v31.69,40.23 31.62,40.37 32.69,41.45 | v36.74,51.04 36.74,45.5 32.69,41.45 | v49.34,26.04 37.02,38.36 37.02,38.43 35.49,39.96 34.18,39.96 32.69,41.45
12C_PW  (via drill 0.3)
  Top 0.15: SENSOR2.6 161.81,9.97 162.01,9.97 162.98,9 162.98,4.92 161.88,3.81 C1.1 161.81,3.74 160.84,3.74 C2.1 160.77,3.81 160.77,3.95 159.73,4.99 R1_PINH.2 159.66,5.05 158.69,5.05 R2-PINH.2 158.69,5.12 158.07,5.75 158.07,7.89 | 158.07,8.66 158.55,9.14 158.83,9.14 SENSOR2.2 | 158.07,7.89 158.07,8.66 | 158.07,7.89 159.94,7.89 160.42,8.38 161.74,8.38 SENSOR2.8 | v28.57,57.34 27.25,58.66 27.25,58.93 U2.16 | v122.75,17.52 149.13,17.52 158,8.66 158.07,8.66
  Bottom 0.15: v28.57,57.34 82.93,57.34 v122.75,17.52
32KHZ
  Top 0.15: R2-PINH1.1 92.21,66.34 92.21,62.53 U3.1 92.21,62.46 92.21,62.12 90.96,60.87 89.44,60.87 78.57,50 46.92,50 44.08,47.16 44.08,46.88 44.15,46.81 44.15,45.57 38.61,40.03 36.12,40.03 34.8,41.34 32.17,41.34 28.36,37.53 24.62,37.53 22.2,39.96 22.2,41.41 U2.9
DN
  Top 0.15: J2.A7 168.59,54.5 169.15,54.5 169.35,54.29 169.35,53.81 169.15,53.6 168.59,53.6 J2.B7 168.52,53.53 167.48,53.53 166.86,52.91 162.98,52.91 161.32,51.24 159.38,51.24 D1.4
DP
  Top 0.15: 167.76,54.29 167.97,54.08 168.52,54.08 J2.A6 | 167.76,54.29 167.76,54.78 167.97,54.98 168.52,54.98 J2.B6 | D1.6 159.38,53.18 166.58,53.18 167.69,54.29 167.76,54.29
EPD_3V3  (via drill 0.3)
  Top 0.3: v70.74,13.92 70.74,15.03 Q2.2 | v71.92,12.74 73.23,11.43 TP17.TP | J1.16 85.7,14.89 86.12,14.89 J1.15 86.12,15.03 v86.12,21.54 | v86.6,24.52 87.5,23.61 87.92,23.61 EPD_C5.2 | v84.52,26.59 84.52,27.42 C7.1 84.59,27.56 84.73,27.7 84.73,30.61 L1.2
  Bottom 0.3: v70.74,13.92 v71.92,12.74 72.06,12.81 80.51,12.81 86.05,18.35 86.05,21.4 v86.12,21.54 86.12,23.96 86.53,24.38 v86.6,24.52 v84.52,26.59
EPD_3V3_C
  Top 0.3: TP13.TP 28.15,63.71 24.76,60.32 24.76,59 U2.18 24.62,58.86 24.62,58.52 16.8,50.69 15.48,50.69 13.68,48.89 13.68,45.36 11.26,42.94 11.26,39.89 33.28,17.87 49.34,17.87 R_CL1.1 49.48,17.73 52.11,15.1 68.8,15.1 Q2.1
EPD_BUSY  (via drill 0.3)
  Top 0.15: v89.09,21.88 89.09,14.89 J1.9 | U2.26 14.58,59 14.58,59.21 15.27,59.9 v15.27,60.11 15.27,60.18 13.82,61.63 13.82,67.66 TP9.TP
  Bottom 0.15: v89.09,21.88 89.09,26.87 59.11,56.85 25.8,56.85 22.54,60.11 v15.27,60.11
EPD_CS  (via drill 0.3)
  Top 0.15: v24.76,38.02 24.76,41.41 U2.11 | v24.76,34 24.76,33.52 25.45,32.83 TP10.TP | v87.64,21.54 87.64,14.89 J1.12 | v64.44,37.88 63.75,38.57 R9.1 | D6.2 63.68,42.17 63.68,41.97 64.37,41.27 64.37,39.27 63.75,38.64 R9.1 | v36.46,38.23 38.89,38.23 39.79,39.13 63.19,39.13 63.68,38.64 R9.1
  Bottom 0.15: v24.76,34 v24.76,38.02 27.6,38.02 28.57,38.99 31.96,38.99 32.72,38.23 v36.46,38.23 | v87.64,21.54 87.64,24.52 74.27,37.88 v64.44,37.88
EPD_DC  (via drill 0.3)
  Top 0.15: v88.19,21.26 88.19,14.89 J1.11 88.12,14.82 88.12,14.47 85.08,11.43 79.68,11.43 74.41,16.69 73.86,16.69 55.71,34.83 19.57,34.83 17.14,37.26 17.14,41.41 U2.5 | v88.19,27.15 88.19,27.35 89.02,28.18 TP11.TP
  Bottom 0.15: v88.19,27.15 v88.19,21.26
EPD_RST
  Top 0.15: J1.10 88.61,14.82 88.61,14.47 85.28,11.15 75.31,11.15 73.03,13.43 37.16,13.43 10.84,39.75 10.84,46.4 13.26,48.82 13.26,51.11 20.88,58.72 20.88,58.93 U2.21 20.95,59 20.95,59.28 24.34,62.67 24.34,64.54 TP12.TP
FLASH_CS
  Top 0.15: 41.76,44.49 43.39,46.12 D9.2 | 41.76,44.49 38.06,40.79 38.06,40.65 R5.1 37.99,40.79 35.77,40.79 34.11,42.45 26.7,42.45 26.01,41.76 26.01,41.48 U2.12 | 41.76,44.49 35.42,50.83 35.42,53.12 36.53,54.22 36.74,54.22 U1.1
GDR
  Top 0.15: J1.2 92.69,14.89 92.69,17.24 97.82,22.37 Q3.1 97.89,22.37 101.84,18.42 103.57,18.42 R4.2
GND  (via drill 0.3)
  Top 0.3: BOOT_BUTTON.2 BOOT_BUTTON.1 66.59,108.03 66.45,107.89 63.68,107.89 C6.2 63.54,107.75 58.48,107.75 58.07,107.34 56.06,107.34 55.3,108.1 CHANGE_BUTTON.2 55.09,108.1 51.77,108.1 CHANGE_BUTTON.1 51.63,108.1 49.27,108.1 C10.2 | C_DELAY.2 51.42,97.71 51.42,98.89 50.8,99.51 IC1.3 50.59,99.58 50.45,99.58 49.55,100.48 49.55,107.96 C10.2 | J4.G1 20.74,84.76 20.74,85.66 21.64,86.56 21.64,89.47 20.74,90.37 J4.G2 20.6,90.51 20.6,91.48 19.77,92.31 19.77,99.31 | 13.96,102.14 10.15,102.14 9.98,102.32 | 13.96,102.14 14.72,102.14 C9.2 14.86,102.08 17.63,99.31 19.77,99.31 | 9.98,102.32 8.55,103.74 TP5.TP | 19.77,99.31 20.6,99.31 D10.1 | 9.98,102.32 7.17,99.51 TP4.TP 7.24,99.37 7.45,99.17 7.45,95.01 J4.G4 7.52,94.87 7.52,94.39 9.87,92.03 10.08,92.03 J4.P6 10.22,91.96 10.77,91.96 11.81,90.92 11.81,86.49 7.1,81.78 6.62,81.78 J4.G3 6.48,81.72 6.48,75.55 11.95,70.08 11.95,59 U2.28 12.09,58.86 v12.09,53.74 | 13.96,102.14 13.96,104.08 19.01,109.14 24.48,109.14 C5.2 24.62,109.21 25.38,109.21 26.49,108.1 26.63,108.1 RESET_BUTTON.1 26.77,108.1 30.09,108.1 RESET_BUTTON.2 30.3,108.1 30.78,108.58 v31.27,108.58 | v48.23,108.24 49.14,108.24 C10.2 | 141.1,44.11 139.37,44.11 138.81,43.56 C3.- 138.68,43.49 136.94,41.76 134.17,41.76 132.65,43.28 132.31,43.28 MCP73831.2 | 141.1,44.11 142.83,44.11 C2_BAT.2 | U4.9 146.64,58.31 146.64,58.1 146.09,57.55 145.74,57.55 U4.4 145.67,57.41 145.67,44.46 142.35,41.13 141.45,41.13 141.1,41.48 141.1,44.11 | U4.9 146.71,58.45 146.09,59.07 145.74,59.07 U4.1 145.6,59.07 145.32,59.07 143.04,56.78 143.04,55.68 142.35,54.98 R1_PWRUSB.1 142.21,54.85 142.14,54.78 138.54,54.78 IC4.2
  Top 0.3: U4.9 146.78,58.1 147.68,58.1 U4.6 147.82,58.03 148.16,58.03 150.17,56.02 157.03,56.02 C5_USB.2 157.17,55.88 157.17,54.08 157.72,53.53 157.72,52.7 157.24,52.22 156.89,52.22 D1.2 157.3,52.08 157.93,51.45 157.93,42.52 158.48,41.97 170.6,41.97 | C2.2 160.84,5.05 161.81,5.05 C1.2 161.94,5.19 161.94,7.41 162.57,8.03 162.57,8.73 162.22,9.07 161.88,9.07 SENSOR2.7 161.74,9.14 160.91,9.14 | 160.91,9.14 160.63,9.14 159.94,8.45 158.9,8.45 SENSOR2.1 | 160.91,9.14 160.91,10.32 161.32,10.73 161.74,10.73 SENSOR2.5 161.88,10.87 168.8,17.8 169.56,17.8 J3.1 169.7,17.87 170.05,17.87 170.6,18.42 170.6,41.97 | J2.B12 168.59,51.24 168.59,50.97 J2.A1 168.66,50.83 168.66,49.65 169.08,49.24 J2.MP3 169.28,49.17 170.6,49.17 | 170.6,49.17 171.15,49.17 | 171.15,49.17 173.02,49.17 J2.MP1 | J2.B1 168.59,57.41 168.59,57.62 J2.A12 168.66,57.76 168.66,58.93 169.08,59.35 J2.MP4 | 171.15,59.42 169.28,59.42 J2.MP4 | 171.15,59.42 173.02,59.42 J2.MP2 | 171.15,59.42 171.15,49.17 | 130.64,53.25 129.53,53.25 127.6,55.19 C1_BAT1.2 127.67,55.33 135.49,63.16 142.9,63.16 C4_USB.2 143.04,63.23 160.21,63.23 160.97,62.46 R2-USB1.1 161.11,62.33 162.64,62.33 162.71,62.26 R2-USB.2 162.84,62.12 165.96,59 168.52,59 J2.MP4 | 130.64,53.25 131.54,53.25 C1_BAT2.2 | 130.71,46.88 128.01,44.18 127.18,44.18 C1_BAT.2 127.04,44.11 124,44.11 106.13,26.25 106.13,19.39 105.92,19.18 104.74,19.18 104.54,18.97 104.4,18.91 | 130.71,46.88 132.79,46.88 R2_BAT.1 | 130.64,53.25 130.64,47.02 130.71,46.88 | 170.6,49.17 170.6,41.97 | 104.4,18.91 103.64,19.67 R4.1 | 104.4,18.91 104.4,17.45 100.66,13.71 SJ1.1 100.45,13.64 99.9,13.09 97.61,13.09 R2.1 97.4,13.02 96.78,12.4 94.22,12.4 J1.MP1 94.01,12.4 91.66,12.4 89.72,14.34 89.72,14.82 J1.8 89.72,14.96 89.72,22.44
  Top 0.3: 73.37,21.47 73.37,22.02 72.82,22.58 D8.1 | 73.37,21.47 73.37,20.01 EPD_C12.1 | v82.79,21.61 82.38,22.02 82.38,22.3 EPD_C8.1 | v83.76,21.47 83.76,21.95 84.04,22.23 EPD_C7.1 | EPD_C11.1 75.04,19.88 76.49,19.88 78.77,22.16 EPD_C10.1 | EPD_C10.1 78.91,22.16 80.71,22.16 EPD_C9.1 80.85,22.09 v81.48,21.47 | C7.2 83.14,27.42 81.48,27.42 78.08,24.03 78.08,22.92 78.71,22.3 EPD_C10.1 | v76.49,21.47 73.37,21.47 | J1.MP2 80.71,12.4 83.14,12.4 85.15,14.4 85.15,14.82 J1.17 85.22,14.96 85.22,18.21 | 89.72,22.44 88.05,22.44 EPD_C5.1 87.92,22.37 85.63,22.37 EPD_C6.1 85.7,22.23 85.22,21.74 85.22,18.21 | 89.72,22.44 89.85,22.44 | 89.85,22.44 90.62,22.44 EPD_C2.1 | 93.53,23.89 93.53,22.99 92.76,22.23 EPD_C1.1 | 93.53,23.89 92.97,24.45 90.06,24.45 89.85,24.24 89.85,22.44 | D3.1 99.27,27.42 97.61,27.42 94.15,23.96 93.66,23.96 93.53,23.89 | v85.15,18.21 85.22,18.21 | U2.29_1 16.52,47.51 16.52,48.68 U2.29_2 | U2.29_1 16.66,47.51 17.7,47.51 U2.29_4 17.83,47.51 18.94,47.51 U2.29_7 19.01,47.64 19.01,48.68 U2.29_8 | U2.29_5 17.7,48.75 16.66,48.75 U2.29_2 | U2.29_3 16.52,49.93 16.52,48.82 U2.29_2 | U2.29_3 16.66,50 17.7,50 U2.29_6 17.83,50 18.94,50 U2.29_9 19.08,50.07 23.79,54.78 37.36,54.78 37.57,54.57 37.57,52.7 37.36,52.49 36.46,52.49 36.05,52.08 36.05,50.97 36.53,50.48 36.67,50.48 U1.4 36.81,50.48 38.82,50.48 U1.9 40.06,51.52 v43.94,47.64 | U2.1 12.02,41.48 12.02,43.07 16.38,47.44 U2.29_1 | C8.2 95.12,56.65 97.13,56.65 97.82,57.34 C10_SUPERCAP.1 97.75,57.06 98.86,55.95 98.86,54.36 96.36,51.87 89.3,51.87 88.47,52.7 88.47,53.18 U3.13 88.33,52.63 79.26,43.56 60.77,43.56 59.38,42.17 v59.31,42.03 58.97,42.38 58.55,42.38 D12.1 58.41,42.52 54.81,46.12 D9.1 44.84,46.26 44.56,46.54 v44.56,47.02
  Top 0.3: D6.1 63.61,40.72 60.77,40.72 D11.1 60.63,40.79 60.01,40.79 v59.87,40.93 | v15.69,50.14 16.31,50.14 16.38,50.07 U2.29_3
  Bottom 0.3: v48.23,108.24 31.62,108.24 v31.27,108.58 | v83.76,21.47 83.62,21.61 v82.79,21.61 82.65,21.54 82.1,21.54 | 82.1,21.54 81.54,21.54 v81.48,21.47 v76.49,21.47 76.42,21.61 76.42,23.96 59.94,40.44 59.94,40.79 v59.87,40.93 59.87,41.48 v59.31,42.03 | 82.1,21.54 82.1,18.56 82.45,18.21 v85.15,18.21 | v44.56,47.02 v43.94,47.64 | v15.69,50.14 v12.09,53.74
  pour Top: 10.66,41.06 10.64,41.04 10.62,41.02 -20.62,41.02 -20.62,-22.82 230.92,-22.82 230.92,176.02 -20.72,176.02 -20.72,59.48 10.62,59.48 10.64,59.46 10.66,59.44 10.68,59.42 10.68,41.08
  pour Bottom: 10.56,41.06 10.54,41.04 10.52,41.02 -20.62,41.02 -20.62,-23.12 231.12,-23.12 231.12,175.92 -21.02,175.92 -21.02,59.48 10.52,59.48 10.54,59.46 10.56,59.44 10.58,59.42 10.58,41.08
  pour Top: -2.06,40.64 -2.08,40.62 -20.02,40.62 -20.04,40.64 -20.12,40.72 -20.12,-22.37 -19.87,-22.62 229.97,-22.62 230.22,-22.37 230.22,175.37 230.17,175.42 -20.22,175.42 -20.22,59.88 -20.23,59.88 10.42,59.88 10.44,59.86 10.56,59.74 10.58,59.72 10.58,41.03 10.66,40.94 10.68,40.92 10.68,40.88 10.66,40.86 10.64,40.84 10.62,40.82 -1.87,40.82
  pour Bottom: 10.66,40.96 10.64,40.94 10.62,40.92 -20.52,40.92 -20.52,-22.97 -20.47,-23.02 229.87,-23.02 230.52,-22.37 230.52,175.17 230.37,175.32 -20.69,175.32 -20.7,175.32 -20.71,175.32 -20.72,175.32 -20.72,175.33 -20.73,175.33 -20.74,175.33 -20.74,175.34 -20.75,175.34 -20.76,175.35 -20.76,175.35 -20.76,175.36 -20.77,175.37 -20.92,175.62 -20.92,60.03 -20.67,59.78 10.42,59.78 10.44,59.76 10.56,59.64 10.58,59.62 10.58,41.13 10.66,41.04 10.68,41.02 10.68,40.98
INT_RTC  (via drill 0.3)
  Top 0.15: v90.34,61.35 90.34,61.84 89.72,62.46 U3.3 | R1_PINH1.1 91.1,50.21 v90.34,50.97 87.22,50.97 79.19,42.94 62.78,42.94 61.25,41.41 59.31,41.41 59.04,41.69 41.52,41.69 38.54,38.71 v35.98,38.71 | v20.95,35.8 20.95,41.41 U2.8 | v20.95,23.48 22.96,21.47 TP15.TP
  Bottom 0.15: v90.34,61.35 v90.34,50.97 | v20.95,23.48 v20.95,35.8 21.02,35.8 24.48,39.27 32.1,39.27 32.65,38.71 v35.98,38.71
IO/BOOT  (via drill 0.3)
  Top 0.15: R_BOOT.1 72.33,109.21 71.37,109.21 70.95,108.79 67.49,108.79 66.73,109.55 BOOT_BUTTON.4 66.59,109.48 66.31,109.21 63.68,109.21 C6.1 63.61,109.14 v62.78,108.31 | v28.57,62.39 28.57,59 U2.15
  Bottom 0.15: v28.57,62.39 28.57,74.1 v62.78,108.31
IO/CHANGE
  Top 0.15: R_CHANGE.1 57.1,109.28 56.41,109.28 55.99,108.86 52.39,108.86 51.7,109.55 CHANGE_BUTTON.4 51.63,109.55 51.56,109.48 49.27,109.48 C10.1 49.2,109.42 48.79,109.42 47.75,108.38 47.75,101.73 18.39,72.37 18.39,59 U2.23
MISO  (via drill 0.3)
  Top 0.15: v57.79,37.88 58.41,37.26 R8.1 | v57.79,40.16 57.79,40.3 58.41,40.93 D12.2 | v35.91,52.98 36.74,52.98 U1.2 | J4.P7 10.36,93.07 10.49,93.07 12.23,91.34 12.23,80.4 7.86,76.04 TP6.TP 7.86,75.97 12.36,71.47 12.36,67.38 13.26,66.48 13.26,59 U2.27 13.33,58.93 13.33,58.66 v14.16,57.82
  Bottom 0.15: v57.79,37.88 v57.79,40.16 57.72,40.16 46.37,51.52 43.8,51.52 42.35,52.98 v35.91,52.98 19.01,52.98 v14.16,57.82
MOSI  (via drill 0.3)
  Top 0.15: v19.63,35.8 19.63,41.41 U2.7 | v19.63,34.35 19.63,33.31 19.91,33.03 TP7.TP | v9.59,88.02 10.29,88.71 J4.P3 | v86.67,21.81 86.67,14.89 J1.14 | v64.51,36.63 61.32,36.63 60.98,36.98 R7.1 | v51.49,50.48 44.63,50.48 U1.5 | v60.98,43 60.77,42.8 60.77,42.17 D11.2
  Bottom 0.15: v19.63,34.35 v19.63,35.8 17.9,35.8 10.84,42.87 10.84,58.31 | v9.59,88.02 9.59,60.66 10.84,59.42 10.84,58.31 | v86.67,21.81 86.67,23.96 87.08,24.38 87.08,24.65 75.1,36.63 v64.51,36.63 64.51,36.7 63.95,37.26 63.95,38.02 59.97,42 | 59.97,42 v51.49,50.48 51.42,50.48 50.1,51.8 43.94,51.8 42.28,53.46 28.36,53.46 23.51,58.31 10.84,58.31 | 59.97,42 v60.98,43
N$1  (via drill 0.3)
  Top 0.15: v161.11,59.55 161.11,61.01 R2-USB1.2 | v167.62,53.05 168.52,53.05 J2.A5
  Bottom 0.15: v167.62,53.05 v161.11,59.55
N$2
  Top 0.15: R2-USB.1 162.78,60.87 163.19,60.87 167.97,56.09 168.52,56.09 J2.B5
N$3
  Top 0.15: C1_BAT1.1 128.84,55.26 130.71,55.26 130.99,55.54 D2.1 131.06,55.54 132.03,55.54 132.65,54.91 137.84,54.91 | 137.84,54.91 137.84,55.12 138.33,55.61 138.47,55.61 IC4.3 | 137.84,54.91 137.84,54.29 138.33,53.81 138.47,53.81 IC4.1 138.61,53.74 139.65,53.74 143.8,49.58 144.15,49.58 Q1.2
N$4
  Top 0.15: 89.02,38.78 87.57,38.78 85.63,40.72 D4.1 | 89.02,38.78 C4.1 | 89.02,38.78 89.02,37.05 95.74,30.33 95.74,27.49 D3.2
N$7
  Top 0.15: C_DELAY.1 52.81,97.71 52.81,100.69 53.5,101.38 IC1.5
N$8
  Top 0.15: CHG_LED.C 129.33,44.25 129.33,43.9 128.7,43.28 128.7,41.13 129.53,40.3 R1_BAT.1
N$9
  Top 0.15: R1_BAT.2 130.92,40.3 130.92,43.21 131.96,44.25 MCP73831.1
N$10
  Top 0.15: R2_BAT.2 134.11,46.88 134.11,45.01 134.8,44.32 MCP73831.5
N$11
  Top 0.15: J1.24 81.61,14.89 77.18,14.89 73.44,18.63 EPD_C12.2
N$13  (via drill 0.3)
  Top 0.15: v82.65,18.77 82.65,14.89 J1.22 | v79.68,23.75 79.05,23.75 78.84,23.55 EPD_C10.2
  Bottom 0.15: v82.65,18.77 84.52,20.64 84.52,22.58 83.34,23.75 v79.68,23.75
N$15
  Top 0.15: J1.19 84.11,14.89 84.11,20.5 83.28,21.33 83.28,22.71 84.04,23.48 EPD_C7.2
N$16  (via drill 0.3)
  Top 0.15: v83.62,20.36 83.62,14.89 J1.20 | v83.21,23.27 82.72,23.27 82.38,23.61 EPD_C8.2
  Bottom 0.15: v83.62,20.36 83.62,20.71 84.25,21.33 84.25,22.23 v83.21,23.27
N$17
  Top 0.15: D7.1 92.62,68.7 92.62,67.38 95.4,64.61 R_CAPACITOR.2
N$18
  Top 0.15: J1.18 84.66,14.89 84.66,21.74 84.94,22.02 84.94,23.06 85.56,23.68 EPD_C6.2
N$19  (via drill 0.3)
  Top 0.15: v34.45,40.86 34.11,40.51 33.76,40.51 R1.1 | v34.59,42.59 34.38,42.59 34.25,42.73 24.48,42.73 23.44,41.69 23.44,41.48 U2.10
  Bottom 0.15: v34.45,40.86 34.45,42.45 v34.59,42.59
N$20
  Top 0.15: J1.5 91.17,14.89 91.17,21.88 91.31,22.02 91.31,23.13 90.69,23.75 EPD_C2.2
N$22
  Top 0.15: J1.4 91.66,14.89 91.66,22.44 92.69,23.48 EPD_C1.2
PREVGH
  Top 0.15: J1.21 83.14,14.89 83.14,20.43 81.41,22.16 81.41,22.78 80.78,23.41 EPD_C9.2 80.92,23.34 82.58,25 94.63,25 98.03,28.39 98.03,34.07 D5.1
PREVGL
  Top 0.15: J1.23 82.1,14.89 82.1,15.3 78.91,18.49 75.04,18.49 EPD_C11.2 74.97,18.56 74.27,19.25 74.27,20.22 74.48,20.43 76.07,20.43 76.97,21.33 76.97,30.89 82.1,36.01 82.1,40.72 D4.2
RESE
  Top 0.15: J1.3 92.21,14.89 92.21,18.07 97.82,23.68 Q3.2 97.89,23.68 100.73,23.68 104.54,19.88 105.37,19.88 R3.2
RESE'
  Top 0.15: R2.2 97.47,11.77 100.24,11.77 100.59,12.12 SJ1.2 100.66,12.19 100.8,12.19 105.37,16.76 105.37,18.49 R3.1
RESET  (via drill 0.3)
  Top 0.15: v25.45,108.38 25.04,107.96 C5.1 | v25.59,109.76 26.49,109.76 26.63,109.62 RESET_BUTTON.4 | v31.27,109.35 32.1,109.35 R_RESET.1 | v50.1,102.08 IC1.1 | v14.58,44.87 14.58,41.48 U2.3 | v25.45,57.82 v20.12,52.49
  Bottom 0.15: 25.45,109.35 25.45,109.62 v25.59,109.76 | 25.45,109.35 v25.45,108.38 | 25.45,109.35 30.78,109.35 | 30.78,109.35 v31.27,109.35 | 37.16,102.08 v50.1,102.08 | 37.16,102.08 30.78,108.44 30.78,109.35 | v14.58,44.87 14.58,46.95 v20.12,52.49 | v25.45,57.82 25.45,58.03 23.58,59.9 23.58,88.43 37.16,102 37.16,102.08
RTC_RST
  Top 0.15: U2.17 26.01,58.93 26.01,58.66 27.81,56.85 83.14,56.85 88.4,62.12 88.4,62.46 U3.4
RX
  Top 0.15: U2.24 17.14,59 17.14,72.71 17.28,72.85 TP2.TP
SCK  (via drill 0.3)
  Top 0.15: R6.1 18.32,102.35 19.08,102.35 20.6,100.83 D10.2 | v11.26,90.23 10.56,90.92 10.36,90.92 J4.P5 | v19.84,100 20.6,100.76 D10.2 | TP8.TP 30.65,92.8 28.64,92.8 20.67,100.76 D10.2 | 45.05,35.32 19.5,35.32 18.39,36.42 18.39,41.41 U2.6 | 45.05,35.32 55.64,35.32 72.89,18.07 73.44,18.07 79.81,11.7 84.38,11.7 87.08,14.4 87.08,14.82 J1.13 | v44.63,51.04 44.63,51.66 U1.6 44.56,51.8 v44.01,52.35 | v45.05,35.39 45.05,35.32
  Bottom 0.15: v19.84,100 11.26,91.41 v11.26,90.23 11.26,63.5 16.17,58.59 23.65,58.59 28.5,53.74 42.63,53.74 v44.01,52.35 | v44.63,51.04 44.63,47.58 45.05,47.16 v45.05,35.39
SCL  (via drill 0.3)
  Top 0.15: v157.93,4.43 158,4.43 158.62,3.81 R2-PINH.1 | v157.93,10.11 158.55,10.73 158.83,10.73 SENSOR2.4 | v148.93,58.03 148.44,58.52 147.75,58.52 U4.7 | v148.93,43.28 148.93,41.48 169.08,21.33 | 169.08,21.33 169.56,20.84 J3.4 | 169.08,21.33 v168.52,20.77 | v24.83,61.84 22.2,59.21 22.2,59 U2.20 | v91.59,54.36 91.59,53.88 92.21,53.25 U3.16
  Bottom 0.15: v157.93,4.43 v157.93,10.11 157.93,10.18 v168.52,20.77 | v148.93,43.28 v148.93,58.03 148.93,59.14 148.58,59.49 91.59,59.49 | v24.83,61.84 90.48,61.84 91.59,60.73 91.59,59.49 | v91.59,54.36 91.59,59.49
SDA  (via drill 0.3)
  Top 0.15: v24.07,60.04 23.44,59.42 23.44,59 U2.19 | v90.89,54.64 90.89,53.32 90.96,53.25 U3.15 | v159.73,2.98 159.73,3.74 R1_PINH.1 | v159.73,9.35 159.1,9.97 158.9,9.97 SENSOR2.3 | v148.44,59 147.75,59 U4.8 | v148.44,42.8 148.44,40.23 168.87,19.8 | 168.87,19.8 169.56,19.8 J3.3 | v168.52,19.39 168.87,19.74 168.87,19.8
  Bottom 0.15: v24.07,60.04 80.64,60.04 90.2,50.48 90.48,50.48 90.89,50.9 | v90.89,54.64 90.89,50.9 | v159.73,2.98 v159.73,9.35 159.73,10.6 v168.52,19.39 | v148.44,42.8 148.44,50.9 | 148.44,50.9 v148.44,59 | 148.44,50.9 90.89,50.9
SRC
  Top 0.15: 90.41,37.53 97.96,37.53 98.03,37.6 D5.2 97.96,37.46 100.1,35.32 100.1,26.94 99.97,26.8 99.9,26.8 96.16,23.06 95.81,23.06 Q3.3 | 90.41,37.53 89.72,37.53 C4.2 | 90.41,37.53 90.41,39.2 88.19,41.41 85.01,41.41 84.8,41.2 84.8,35.25 L1.1
SS_SD  (via drill 0.3)
  Top 0.15: v72.06,17.87 72.13,17.87 74,16 R10.1 | v72.06,21.81 71.3,22.58 D8.2 | 16.48,42.35 17.21,43.07 v36.74,43.07 | 16.48,42.35 15.83,41.69 15.83,41.48 U2.4 | v11.32,47.51 11.32,58.93 5.3,64.96 5.3,82.96 9.94,87.6 10.7,87.6 J4.P2 | 16.48,42.35 v16.24,42.59
  Bottom 0.15: v72.06,17.87 v72.06,21.81 58,21.81 v36.74,43.07 | v16.24,42.59 v11.32,47.51
TX
  Top 0.15: U2.25 15.76,59 15.76,74.31 15.2,74.86 TP1.TP
USB_D+  (via drill 0.3)
  Top 0.15: v141.72,38.3 156.54,53.12 D1.1 | v33.83,41.83 28.91,41.83 28.57,41.48 U2.14
  Bottom 0.15: v141.72,38.3 141.72,35.87 118.11,12.26 63.75,12.26 35.63,40.37 34.32,40.37 33.83,40.86 v33.83,41.83
USB_D-  (via drill 0.3)
  Top 0.15: v156.82,50.55 156.82,51.18 D1.3 | v28.71,38.5 28.71,39.75 27.25,41.2 27.25,41.41 U2.13
  Bottom 0.15: v156.82,50.55 118.25,11.98 55.23,11.98 v28.71,38.5
VBAT  (via drill 0.3)
  Top 0.3: 132.31,41.69 132.31,37.95 134.24,36.01 TP3.TP | 132.31,41.69 132.31,42.31 MCP73831.3 | U4.2 145.74,58.52 145.74,58.1 U4.3 145.6,58.03 145.32,58.03 143.52,56.23 143.52,51.87 143.32,51.66 Q1.3 143.45,51.59 144.91,50.14 144.91,44.94 142.9,42.94 C2_BAT.1 142.76,42.8 v141.65,41.69 | v133.48,41.69 132.31,41.69
  Bottom 0.3: v141.65,41.69 v133.48,41.69
VBUS  (via drill 0.3)
  Top 0.3: TP14.TP 123.09,41.34 124.55,42.8 127.11,42.8 C1_BAT.1 127.18,42.66 127.18,41.41 129.12,39.47 130.02,39.47 130.23,39.68 130.23,42.1 129.6,42.73 CHG_LED.A 129.4,42.87 129.53,42.87 131.54,44.87 132.93,44.87 134.8,43 | 134.8,43 134.8,42.38 MCP73831.4 | 141.38,49.51 142.28,49.51 Q1.1 | 141.38,49.51 134.94,43.07 134.8,43 | 141.31,56.3 142.14,56.3 142.21,56.23 R1_PWRUSB.2 142.07,56.44 142.97,57.34 142.97,59.55 | 141.31,56.3 135.21,56.3 134.52,55.61 133.21,55.61 D2.2 | 142.97,59.55 142.97,61.91 C4_USB.1 | PFMF.050.1.2 159.24,44.11 158.41,44.94 158.41,51.66 158.83,52.08 D1.5 159.31,52.22 158.9,52.22 158.41,52.7 158.41,55.88 C5_USB.1 158.34,56.02 154.81,59.55 142.97,59.55 | v141.31,51.45 141.31,49.65 141.38,49.51 | v141.31,56.16 141.31,56.3
  Bottom 0.3: v141.31,56.16 v141.31,51.45
VRTC
  Top 0.3: C10_SUPERCAP.2 97.82,55.19 97.75,55.26 95.12,55.26 C8.1 94.98,55.4 94.29,56.09 | 94.29,56.09 94.29,57.06 95.4,58.17 95.4,63.29 R_CAPACITOR.1 | U3.14 89.72,53.25 89.72,54.22 91.52,56.02 94.15,56.02 94.29,56.09
VUSB  (via drill 0.3)
  Top 0.3: J2.A9 168.59,56.78 168.59,56.58 J2.B4 168.73,56.51 169.28,56.51 169.77,56.02 169.77,52.63 169.22,52.08 168.73,52.08 J2.B9 168.59,52.01 168.59,51.8 J2.A4 168.45,51.73 v162.43,51.73 | v155.92,45.22 154.81,44.11 PFMF.050.1.1
  Bottom 0.3: v155.92,45.22 v162.43,51.73